# Altium PCB PCBB_BUZZ.PcbDoc
Units mil, origin at the board's own origin, x right, y up, seen from the top; angles counter-clockwise.
Board outline 4705 x 1045 mil, 2 copper layers (Top Layer, Bottom Layer); 12 components, 9 nets, 32 pads, 4 vias.
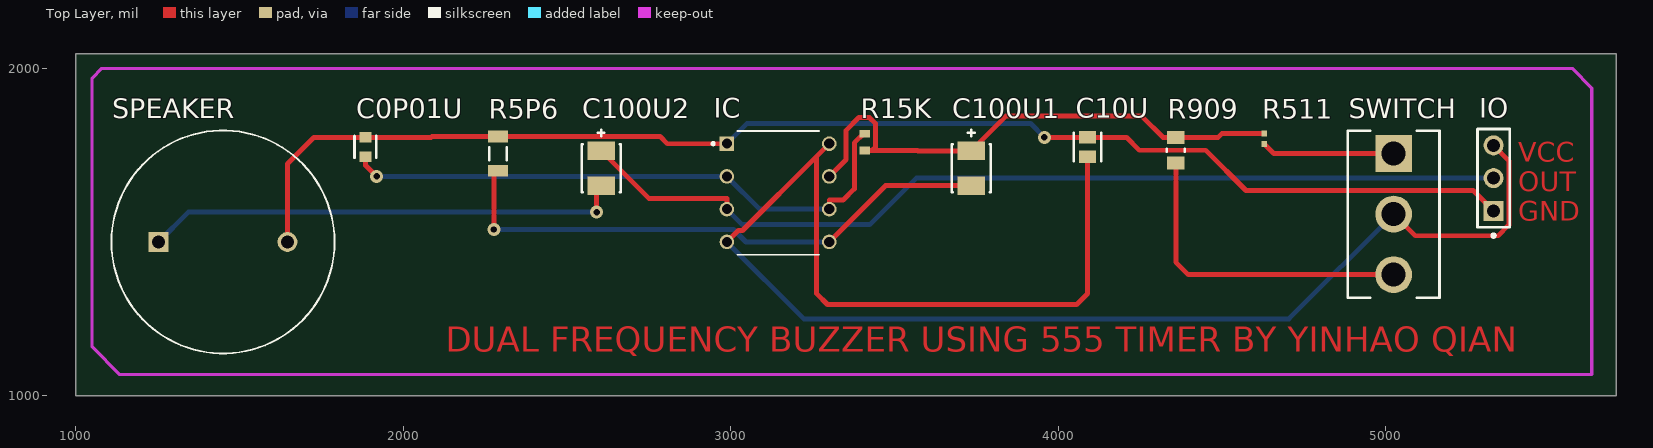
[diagram p0: Top Layer view]
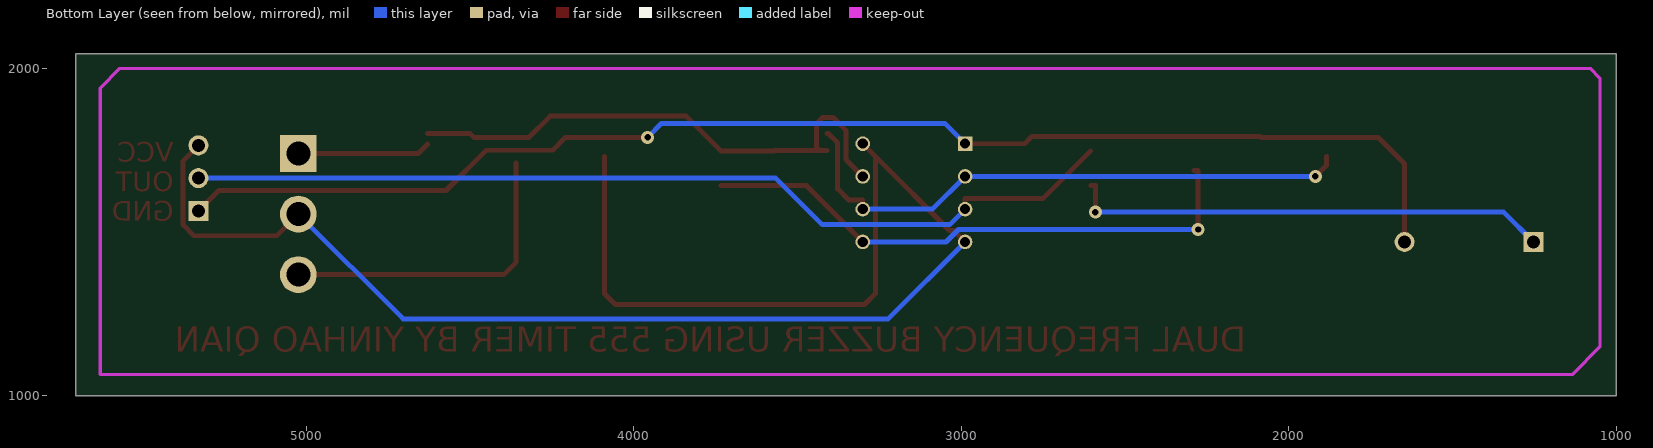
[diagram p1: Bottom Layer view, seen from below]
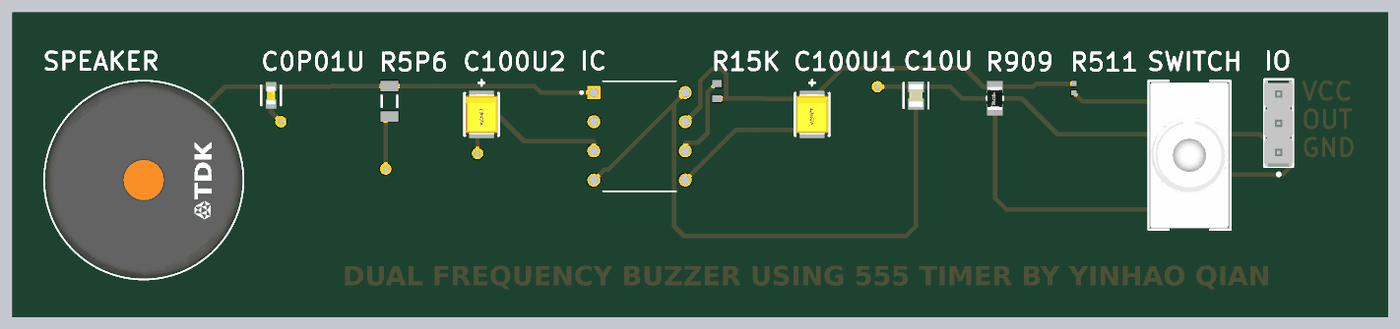
[diagram p2: 3D render of the assembled board from above, using the file's embedded part models]

## Layer stack, top to bottom
Top Solder: solder mask 0.4, Solder Resist, Dk 3.5
Top Layer: signal copper 1.4
Dielectric 1: dielectric 12.6, FR-4, Dk 4.8
Bottom Layer: signal copper 1.4
Bottom Solder: solder mask 0.4, Solder Resist, Dk 3.5

## Board outline
1000,1000 5705,1000 5705,2045 1000,2045

## Design rules (kind name [scope] priority, off if disabled: settings)
BoardOutlineClearance [All] p1: gap=7.87 ignorepadtopadclearanceinfootprint=FALSE except(15.75: Arc-SplitBarrior Arc-SplitContinuation Track-SplitBarrior Track-SplitContinuation SMDPad-SplitBarrior SMDPad-SplitContinuation THPad-SplitBarrior THPad-SplitContinuation Via-SplitBarrior Via-SplitContinuation Fill-SplitBarrior Fill-SplitContinuation Poly-SplitBarrior Poly-SplitContinuation Region-SplitBarrior Region-SplitContinuation Text-SplitBarrior Text-SplitContinuation)
Clearance "Clearance Bottom Layer" [OnLayer('Bottom Layer')] p1: gap=8 ignorepadtopadclearanceinfootprint=TRUE except(10: Arc-Text Track-Text SMDPad-Text THPad-Text Via-Text Fill-Text Poly-Text Region-Text Text-Text)
Clearance "Clearance Top Layer" [OnLayer('Top Layer')] p2: gap=8 ignorepadtopadclearanceinfootprint=TRUE except(10: Arc-Text Track-Text SMDPad-Text THPad-Text Via-Text Fill-Text Poly-Text Region-Text Text-Text)
Clearance [All] p3: gap=7.87 ignorepadtopadclearanceinfootprint=FALSE except(3.5: Arc-Arc Arc-Track Arc-SMDPad Track-Track Track-SMDPad SMDPad-SMDPad; 5: Arc-Via Track-Via SMDPad-Via THPad-Via Via-Via; 10: Arc-Text Track-Text SMDPad-Text THPad-Text Via-Text Fill-Text Poly-Text Region-Text Text-Text)
HoleSize [All] p1: absolutevalues=TRUE maxlimit=248.03 minlimit=7.87 maxpercent=80.000 minpercent=20.000
MinimumAnnularRing [All] p1: minimumring=3
MinimumSolderMaskSliver [All] p1: minsoldermaskwidth=3.94
PolygonConnect PolygonConnect_1 [All] p1: thpad.connectstyle=Relief thpad.reliefconductorwidth=20 thpad.reliefentries=4 thpad.polygonreliefangle="90 Angle" thpad.airgapwidth=10 smdpad.connectstyle=Relief smdpad.reliefconductorwidth=20 smdpad.reliefentries=4 smdpad.polygonreliefangle="90 Angle" smdpad.airgapwidth=10 via.connectstyle=Direct via.reliefconductorwidth=20 via.reliefentries=4 via.polygonreliefangle="90 Angle" via.airgapwidth=10
RoutingCorners [All] p1: cornerstyle=Round minsetback=100 maxsetback=100
RoutingVias [All] p1: holewidth=19.68 width=39.37 viastyle="Through Hole" minholewidth=7.87 minwidth=17.72 maxholewidth=39.37 maxwidth=78.74
SilkToSilkClearance [All] p1: silktosilkclearance=3.94
SilkToSolderMaskClearance [IsPad] p1: minsilkscreentomaskgap=3.94 clearancetoexposedcopper=TRUE
SolderMaskExpansion [All] p1: expansion=4 istentingtop=FALSE
Width [All] p1: maxlimit=100 minlimit=3.5 preferedwidth=15
25 further rules are at their usual default settings.

## Components (designator, comment, footprint, x,y, rotation, side; value= is the part's Value field where it differs from the comment)
C0P01U "CC0603KRX7R8BB103" FP-CC0603-DA-MFG 1885,1760 r90 top value="10 nF"
C10U "C0805C106K8PACTU" FP-C0805C-DG-MFG 4090,1760 r90 top value=10uF
C100U1 "T491B107M010AT" FP-T491B107M010AT-MFG 3735,1695 r90 top
C100U2 "T491B107M010AT" FP-T491B107M010AT-MFG 2605,1695 r90 top
IC "NE555P" DIP794W45P254L959H508Q8 3145,1620 r0 top
IO "22-28-4033" MOLX-22-28-4033_V 5330,1665 r90 top
R5P6 "ERJ8ENF5601V" RESC3216X70X50LL05T20 2290,1740 r90 top
R15K "RC0603FR-0715KL" RESC1608X55X25LL10T15 3410,1775 r90 top
R511 "CPF0402B511RE1" RESC1005X35X20LL05T10 4630,1785 r90 top
R909 "RP73PF2A909RBTDF" FP-RP73P-2A-MFG 4360,1750 r90 top value=909Ω
SPEAKER "PS1720P02" FP-PS1720P02-MFG 1450,1470 r0 top
SWITCH "A101SYCB04" FP-A101SYCB04-MFG 5025,1555 r0 top

## Footprints (in the part's own frame and the unit in brackets; to place one, negate y for a bottom-side part, rotate by r counter-clockwise, add the part's x,y. Pads: shape width x height; smd on the part's side, far side on the other; paste and mask are expansions set on the pad)
DIP794W45P254L959H508Q8 [mm]
  rect 1.13x1.13 hole 0.78: 1(-3.97,3.81)
  round 1.13 hole 0.78: 2(-3.97,1.27) 3(-3.97,-1.27) 4(-3.97,-3.81) 5(3.97,-3.81) 6(3.97,-1.27) 7(3.97,1.27) 8(3.97,3.81)
  silkscreen extent -5.13,-4.8 3.17,4.8
FP-A101SYCB04-MFG [mil]
  rect 112.37x112.37 hole 73 paste-39370.1 mask+0: 1(0,185)
  round 112.37 hole 73 paste-39370.1 mask+0: 2(0,0) 3(0,-185)
  silkscreen extent -140,-255 140,255, body extent -144,-259 144,259, height 10
FP-C0805C-DG-MFG [mm]
  rect 0.95x1.35 smd paste+0 mask+0: 1(-0.75,0) 2(0.75,0)
  silkscreen extent -1.11,-1.08 1.1,1.07, body extent -1.4,-0.85 1.4,0.85, height 0.25
FP-CC0603-DA-MFG [mm]
  rect 0.8x0.9 smd paste+0 mask+0: 1(-0.75,0) 2(0.75,0)
  silkscreen extent -0.85,-0.85 0.85,0.85, body extent -1.35,-0.75 1.35,0.75, height 0.25
FP-PS1720P02-MFG [mm]
  rect 1.55x1.55 hole 1 paste-1000 mask+0: 1(-5,0)
  round 1.55 hole 1 paste-1000 mask+0: 2(5,0)
  silkscreen extent -8.65,-8.65 8.65,8.65, body extent -8.75,-8.75 8.75,8.75, height 0.25
FP-RP73P-2A-MFG [mm]
  rect 1x1.35 smd paste+0 mask+0: 1(-1,0) 2(1,0)
  silkscreen extent -0.13,-0.7 0.13,0.7, body extent -1.6,-0.8 1.6,0.8, height 0.25
FP-T491B107M010AT-MFG [mm]
  rect 1.42x2.13 smd paste+0 mask+0: 1(-1.35,0) 2(1.35,0)
  silkscreen extent -1.85,-1.5 3,1.5, body extent -2.18,-1.62 2.18,1.62, height 0.25
MOLX-22-28-4033_V [mm] "THD, 3-Leads, Body 7.62x2.49mm, Pitch 2.54mm"
  rect 1.55x1.55 hole 1.02: 1(-2.54,0)
  round 1.55 hole 1.02: 2(0,0) 3(2.54,0)
  silkscreen extent -4.58,-1.25 3.81,1.25, body extent -3.81,-1.24 3.81,1.24, height 8.38
RESC1005X35X20LL05T10 [mm] "Chip Resistor, 2-Leads, Body 1.00x0.50mm, IPC High Density"
  rect 0.45x0.45 smd: 1(-0.4,0) 2(0.4,0)
  body extent -0.53,-0.27 0.53,0.28, height 0.35
RESC1608X55X25LL10T15 [mm] "Chip Resistor, 2-Leads, Body 1.70x0.90mm, IPC High Density"
  rect 0.6x0.8 smd: 1(-0.65,0) 2(0.65,0)
  body extent -0.85,-0.45 0.85,0.45, height 0.55
RESC3216X70X50LL05T20 [mm] "Chip Resistor, 2-Leads, Body 3.20x1.60mm, IPC High Density"
  rect 0.9x1.55 smd: 1(-1.325,0) 2(1.325,0)
  silkscreen extent -0.5,-0.67 0.5,0.67, body extent -1.63,-0.82 1.62,0.82, height 0.7

## Part data
C0P01U: library part CMP-03422-000327-1, "CAP CER 10000PF 25V X7R 0603", Capacitance="10 nF", Manufacturer=YAGEO, Package=CC0603-DA, Temperature="-55°C to +125°C", Temperature Characteristic=X7R, Temperature Coefficient=15%, Temperature Range High=+125°C, Temperature Range Low=-55°C, Tolerance=0.1, Voltage="25 V", Automotive=No, Category=Cap, ComponentLink2Description=Datasheet, ComponentLink2URL=http://www.yageo.com/documents/recent/UPY-GPHC_X7R_6.3V-to-50V_18.pdf, Device Class L1="Passive Components", Device Class L2=Capacitors, Device Class L3="Ceramic Capacitors", Digikey Description="CAP CER 10000PF 25V X7R 0603", Footprint Url=http://www.yageo.com/exep/pages/download/literatures/UPY-C_GEN_24.pdf, Height=0.9mm, Lead Free=Yes, Manufacturer Part Number=CC0603KRX7R8BB103, Material=Ceramic, Mouser Description="Multilayer Ceramic Capacitors MLCC - SMD/SMT 10nF 25V X7R 10%", Octopart=https://octopart.com/cc0603krx7r8bb103-yageo-9288195, RoHS=TRUE, Voltage Rating="25 V"
C10U: library part CMP-2007-03243-2, "CAP CER 10UF 10V X5R 0805", 3DS Part Number=220-00001, Capacitance=10uF, Manufacturer=Kemet, Package=C0805C-DG, Temperature="-55°C to +85°C", Temperature Characteristic=X5R, Temperature Coefficient=15%, Temperature Range High=+85°C, Temperature Range Low=-55°C, Tolerance=10%, Voltage=10V, Automotive=No, Category=Cap, ComponentLink2Description=Datasheet, ComponentLink2URL=https://content.kemet.com/datasheets/KEM_C1006_X5R_SMD.pdf, Device Class L1="Passive Components", Device Class L2=Capacitors, Device Class L3="Ceramic Capacitors", Digikey Description="CAP CER 10UF 10V X5R 0805", Height=1.4mm, Ipc Land Pattern Name=CAPC200125X125, Lead Free=Yes, Manufacturer Part Number=C0805C106K8PACTU, Material=Ceramic, Mouser Description="CAP CER 10UF 10V X5R 0805", Octopart=https://octopart.com/c0805c106k8pactu-kemet-98697, RoHS=TRUE, Voltage Rating=10V
C100U1 C100U2: library part CMP-03017-000045-1, "CAP TANT 100UF 20% 10V 1411", Capacitance=100uF, Case Code (Imperial)=1411, Case Code (Metric)=3528, ESR (Equivalent Series Resistance)=3R, Max Operating Temperature=125°C, Min Operating Temperature=-55°C, Package Quantity=1, Tolerance=10%, Voltage=10V, Case/Package=1411, Construction=Flat, Depth=2.8mm, Dissipation Factor=15%, Features="General Purpose", Height=2.1mm, Height - Seated (Max)=0.083inch, Lead Free="Lead Free", Length=3.5mm, Life (Hours)=2000Hour, Mount="Surface Mount", Packaging="Tape and Reel", Polarity=Polar, Radiation Hardening=No, REACH SVHC="No SVHC", RoHS Compliant=Yes, Series=T491, Termination=SMD/SMT, Voltage Rating=10V, Voltage Rating (DC)=10V, Weight=0.002293oz, Width=0.11inch
IC: Package=None, Availability=Unavailable, MP=NE555P, Price=None
IO: library part CMP-1676-00001-5, "Male Header, Pitch 2.54 mm, 1 x 3 Position, Height 8.38 mm, Tail Length 3.18 mm, RoHS, Bulk", Colour=Black, Current Rating="4 A", Manufacturer=Molex, Max Operating Temperature="75 degC", Min Operating Temperature="0 degC", Package Quantity=1, Voltage Rating="250 V", ComponentLink1Description="Manufacturer URL", ComponentLink1URL=http://www.molex.com/, ComponentLink2Description=Datasheet, ComponentLink2URL=http://www.molex.com/pdm_docs/sd/022284033_sd.pdf, Contact Finish=Gold, Contact Material=Brass, Contact Plating=Gold, DatasheetVersion="Rev. G, 01/2012", Height="8.38 mm", Lead Pitch="0.1 inch", Length="7.62 mm", Mount="Through Hole", Mounting Technology="Through Hole", PackageDescription="Male Header, Pitch 2.54 mm, 1 x 3 Position, Height 8.38 mm, Tail Length 3.18 mm", PackageReference=22-28-4033, Packaging=Bulk, Pins=3, REACH SVHC=Unknown, RoHSCompliant=true, Rows=1
R5P6: library part CMP-2003-00857-1, Manufacturer=Panasonic, Part Number=ERJ8ENF5601V
R15K: library part CMP-1659-00032-1, "Chip Resistor, 15 KOhm, +/- 1%, 0.1 W, -55 to 155 degC, 0603 (1608 Metric), RoHS, Tape and Reel", ComponentLink1Description="Manufacturer URL", ComponentLink1URL=http://www.yageo.com/, ComponentLink2Description=Datasheet, ComponentLink2URL=http://www.yageo.com/documents/recent/PYu-RC_Group_51_RoHS_L_04.pdf, DatasheetVersion="Rev. 4, 02/2016", PackageDescription="2-Pin Surface Mount Device, Body 1.6 x 0.8 mm", PackageReference=0603, RoHSCompliant=true
R511: library part CMP-2002-03323-1, Manufacturer="TE Connectivity / AMP", Part Number=CPF0402B511RE1
R909: library part CMP-03211-002323-1, "RP73P 0805 909Ω 0.25W 25ppm/°C 0.10% 150V", Manufacturer="TE Connectivity", Package=RP73P-2A, Power Rating=0.25W, Resistance=909Ω, Temperature="-55°C to +155°C", Temperature Coefficient=25ppm/°C, Temperature Range High=+155°C, Temperature Range Low=-55°C, Tolerance=0.001, Voltage Rating=150V, Automotive=No, Category=Res, ComponentLink2Description=Datasheet, ComponentLink2URL=https://www.te.com/commerce/DocumentDelivery/DDEController?Action=srchrtrv&DocNm=1773272&DocType=DS&DocLang=English, Composition="Thin Film", Device Class L1="Passive Components", Device Class L2=Resistors, Device Class L3="Chip SMD Resistors", Height=0.65mm, Ipc Land Pattern Name=RESC200125X55, Lead Free=Yes, Manufacturer Part Number=RP73PF2A909RBTDF, Octopart=https://octopart.com/1-2176092-4-te+connectivity-46440333, RoHS=TRUE, Series=RP73P
SPEAKER: library part CMP-08413-000001-1, "AUDIO PIEZO TRANSDUCER 30V TH", Frequency=2kHz, Manufacturer="TDK Corporation", Package=0, Temperature="-10°C to +70°C", Temperature Range High=+70°C, Temperature Range Low=-10°C, Automotive=No, Category=Speak, ComponentLink2Description=Datasheet, ComponentLink2URL=https://product.tdk.com/info/en/catalog/datasheets/piezoelectronic_buzzer_ps_en.pdf, Device Class L1=Electromechanical, Device Class L2="Audio Products", Device Class L3=Buzzers, Digikey Description="AUDIO PIEZO TRANSDUCER 30V TH", Height=8.3mm, Lead Free=Yes, Manufacturer Part Number=PS1720P02, Mouser Description="Audio Indicators & Alerts Round 17mmx8mm 2 kHz Vin=3V", Octopart=https://octopart.com/ps1720p02-tdk-154429, RoHS=TRUE, Standoff Height=0.5mm
SWITCH: library part CMP-03408-000017-1, "SWITCH TOGGLE SPDT 0.4VA 20V", Actuator Color=Chrome, Contact Current Rating=400mA, Contact Resistance=10mR, Flammability Rating="UL94 V-1", Insulation Resistance=30MR, Max Operating Temperature=85°C, Max Voltage Rating (AC)=20V, Min Operating Temperature=-30°C, Package Quantity=100, Power Rating=400mW, Actuator Length=10.41mm, Actuator Material=Phenolic, Actuator Type="Standard Round", Contact Material=Copper, Contact Plating=Gold, Depth=6.86mm, Electrical Life=6000Cycles, ELV=Compliant, Illumination Type=Non-Illuminated, Lead Free="Lead Free", Max Voltage Rating (DC)=20V, Mount=Panel, Number of Poles=1, Number of Positions=2, Orientation=Straight, Packaging=Bulk, Radiation Hardening=No, REACH SVHC="No SVHC", RoHS Compliant=Yes, Series="Gemini A", Switch Function=On-On, Termination="PC Pins", Throw Configuration=SPDT, Voltage Rating (AC)=20V, Voltage Rating (DC)=20V

## Via types
v1: diameter 39.37, hole 19.68, Top Layer to Bottom Layer, 4 vias

## Nets (pads, with @x,y where several pads share a name; then routed paths per layer and width w, separated by ;. In a path a pad name is that pad's centre, name@x,y a point inside that pad or via, vN(x,y) a via of type N, cw(c..) or ccw(c..) an arc to the next point about the centre after c; other vN are vias at no path point)
NetC0P01U_1: C0P01U.1 IC.2 IC.6 R15K.2 | length 1801.2
  Top Layer w15: C0P01U.1 1885,1704 v1(1919,1670) ; IC.6 3301.3,1598 3344,1598 3378,1632 3378,1772.59 3406,1800.59 R15K.2
  Bottom Layer w15: v1(1919,1670) IC.2 3088.7,1570 IC.6
NetC0P01U_2: C0P01U.2 C10U.2 IC.1 IO.1 R5P6.2 SPEAKER.2 | length 4101.7
  Top Layer w15: SPEAKER.2 1646.85,1708.38 1728,1789.53 C0P01U.2 2086,1789.53 2088.64,1792.17 R5P6.2 2784.83,1792.17 2807,1770 IC.1 ; v1(3958.47,1789.53) C10U.2 4209,1789.53 4248.53,1750 4451,1750 4574,1627 5268,1627 IO.1
  Bottom Layer w15: IC.1 3050.7,1832 3916,1832 v1(3958.47,1789.53)
NetC10U_1: C10U.1 IC.4 IC.8 IO.3 SWITCH.2 | length 5051
  Top Layer w15: IC.4 3023.7,1505 3036.3,1505 3263,1731.7 ; IC.8 3263,1731.7 ; C10U.1 4090,1312 4057,1279 3296,1279 3263,1312 3263,1731.7 ; SWITCH.2 5091,1489 5344,1489 5377,1522 5377,1718 IO.3
  Bottom Layer w15: IC.4 3223.7,1235 4705,1235 SWITCH.2
NetC100U1_1: C100U1.1 IC.5 R5P6.1 | length 1737.8
  Top Layer w15: v1(2277,1508) 2277,1687.83 R5P6.1 ; IC.5 3473.15,1641.85 C100U1.1
  Bottom Layer w15: v1(2277,1508) 3009,1508 3047,1470 IC.5
NetC100U1_2: C100U1.2 IC.7 R15K.1 R511.2 R909.2 | length 1657.6
  Top Layer w15: IC.7 3353,1721.7 3353,1811 3392,1850 3424,1850 3442,1832 3442,1759.41 3432,1749.41 ; R15K.1 3432,1749.41 ; R511.2 4500.38,1800.75 4489,1789.37 R909.2 4320.63,1789.37 4256,1854 3840.85,1854 C100U1.2 3572.26,1748.15 3571,1749.41 3432,1749.41
NetC100U2_1: C100U2.1 SPEAKER.1 | length 1470.4
  Top Layer w15: v1(2591,1561) 2591,1641.85 C100U2.1
  Bottom Layer w15: SPEAKER.1 1344.15,1561 v1(2591,1561)
NetC100U2_2: C100U2.2 IC.3 IO.2 | length 2896.4
  Top Layer w15: C100U2.2 2750.15,1603 2988.7,1603 IC.3
  Bottom Layer w15: IC.3 3035.7,1523 3425,1523 3567,1665 IO.2
NetR511_1: R511.1 SWITCH.1 | length 407.1
  Top Layer w15: R511.1 4659.25,1740 SWITCH.1
NetR909_1: R909.1 SWITCH.3 | length 983.4
  Top Layer w15: R909.1 4360,1408 4398,1370 SWITCH.3

## Keep-outs
Keep-Out Layer:
  lines w10: 1050,1150 1135,1065 5630,1065 5630,1940 5570,2000 1080,2000 1050,1970 1050,1150

## Other copper
Top Layer:
  text "VCC / OUT / GND" at 5405,1535 h60
  text "DUAL FREQUENCY BUZZER USING 555 TIMER BY YINHAO QIAN" at 2130,1109.38 h130